# EAGLE board lab1 (EAGLE 9.7.0)

Size 29.37 x 60.54 mm. Coordinates in mm from the lower left corner, seen from the top.
Outline: 0,0 29.37,0 29.37,60.54 0,60.54 0,0
Copper layers (1*16): Top 0.035mm / dielectric 1.5mm / Bottom 0.035mm
Design rules "default": minimum track width 6mil, minimum drill 0.35mm, track to track 6mil, track to pad 6mil, pad to pad 6mil, via to via 6mil, smd to smd 6mil, copper to edge 40mil, drill to drill 6mil, minimum pad ring 10mil, minimum via ring 8mil, stop-mask expansion 4mil, vias tented up to drill 0mil, thermal gap 10mil

## Footprints (pad centres in the part's own frame; a part is rotated, then mirrored left to right if it is on the bottom)
BATTERY-GENERIC = drill 1.118 pad 3.15 octagon: + 2.54,0; - -2.54,0
RESAD1016W63L850D250B = drill 0.83 pad 1.43: 1 -5.08,0; 2 5.08,0

## Placement (x,y rotation side)
PFONTE  BATTERYGENERIC  [BATTERY-GENERIC]  8.26,52.28 180 top
R1  2.15k  [RESAD1016W63L850D250B]  20.4,34.27 0 top
R2  9.78k  [RESAD1016W63L850D250B]  20.4,8.87 0 top
R3  540  [RESAD1016W63L850D250B]  15.32,21.57 270 top
R4  9.83k  [RESAD1016W63L850D250B]  10.24,31.73 180 top
R5  3.2k  [RESAD1016W63L850D250B]  10.24,6.33 180 top

## Library data of the parts
PFONTE R1-R5 = Tinkercad

## Nets
PFONTE+: PFONTE.+ R1.2 R2.2
PFONTE-: PFONTE.- R4.2 R5.2
R3_1: R1.1 R3.1 R4.1
R3_2: R2.1 R3.2 R5.1

## Tracks (layer width: path | path; a pad name or v marks a point on that pad's centre or on a via)
PFONTE+  (2 unrouted)
PFONTE-  (2 unrouted)
R3_1  (2 unrouted)
R3_2  (2 unrouted)